# EAGLE board USBAspArduino (EAGLE 6.3)

Size 53.32 x 59.99 mm. Coordinates in mm from the lower left corner, seen from the top.
Outline: 0,0 53.32,0 53.32,59.99 0,59.99 0,0
Copper layers (1*16): Top 0.035mm / dielectric 1.5mm / Bottom 0.035mm
Design rules "default *": minimum track width 16mil, minimum drill 24mil, track to track 8mil, track to pad 8mil, pad to pad 8mil, via to via 8mil, smd to smd 8mil, copper to edge 40mil, drill to drill 8mil, minimum pad ring 10mil, minimum via ring 8mil, stop-mask expansion 4mil, vias tented up to drill 0mil, thermal gap 10mil

## Footprints (pad centres in the part's own frame; a part is rotated, then mirrored left to right if it is on the bottom)
C025-025X050 = drill 0.813 octagon: 1 -1.27,0; 2 1.27,0
2X3 = drill 1.016 pad 1.88 octagon: 1 0,0; 2 0,2.54; 3 2.54,0; 4 2.54,2.54; 5 5.08,0; 6 5.08,2.54
AVR_ICSP = drill 1.016 pad 1.88 octagon: 1 -1.27,5.08; 2 1.27,5.08; 3 -1.27,2.54; 4 1.27,2.54; 5 -1.27,0; 6 1.27,0; 7 -1.27,-2.54; 8 1.27,-2.54; 9 -1.27,-5.08; 10 1.27,-5.08
LED3MM = drill 0.813 octagon: A -1.27,0; K 1.27,0
0207/10 = drill 0.813 octagon: 1 -5.08,0; 2 5.08,0
DIP254P762X533-8 = drill 1.118 square: 1 -7.62,7.62 | drill 1.118: 2 -7.62,5.08; 3 -7.62,2.54; 4 -7.62,0; 5 0,0; 6 0,2.54; 7 0,5.08; 8 0,7.62
DIP254P762X533-20 = drill 1.118 square: 1 -7.62,22.86 | drill 1.118: 2 -7.62,20.32; 3 -7.62,17.78; 4 -7.62,15.24; 5 -7.62,12.7; 6 -7.62,10.16; 7 -7.62,7.62; 8 -7.62,5.08; 9 -7.62,2.54; 10 -7.62,0; 11 0,0; 12 0,2.54; 13 0,5.08; 14 0,7.62; 15 0,10.16; 16 0,12.7; 17 0,15.24; 18 0,17.78; 19 0,20.32; 20 0,22.86
DIP254P762X457-28 = drill 1.118 square: 1 -7.62,33.02 | drill 1.118: 2 -7.62,30.48; 3 -7.62,27.94; 4 -7.62,25.4; 5 -7.62,22.86; 6 -7.62,20.32; 7 -7.62,17.78; 8 -7.62,15.24; 9 -7.62,12.7; 10 -7.62,10.16; 11 -7.62,7.62; 12 -7.62,5.08; 13 -7.62,2.54; 14 -7.62,0; 15 0,0; 16 0,2.54; 17 0,5.08; 18 0,7.62; 19 0,10.16; 20 0,12.7; 21 0,15.24; 22 0,17.78; 23 0,20.32; 24 0,22.86; 25 0,25.4; 26 0,27.94; 27 0,30.48; 28 0,33.02
UNO_R3_SHIELD = drill 1.016 pad 1.88: 3.3V 50.8,26.67; 5V 50.8,29.21; A0 50.8,41.91; A1 50.8,44.45; A2 50.8,46.99; A3 50.8,49.53; A4 50.8,52.07; A5 50.8,54.61; AREF 2.54,15.24; D2 2.54,49.53; D3 2.54,46.99; D4 2.54,44.45; D5 2.54,41.91; D6 2.54,39.37; D7 2.54,36.83; D8 2.54,33.02; D9 2.54,30.48; D10 2.54,27.94; D11 2.54,25.4; D12 2.54,22.86; D13 2.54,20.32; GND@0 50.8,31.75; GND@1 50.8,34.29; GND@2 2.54,17.78; IOREF 50.8,21.59; NC 50.8,19.05; RES 50.8,24.13; RX 2.54,54.61; SCL 2.54,10.16; SDA 2.54,12.7; TX 2.54,52.07; VIN 50.8,36.83
QS = drill 0.61 long: 1 -2.54,0; 2 2.54,0

## Placement (x,y rotation side)
C1  22pf  [C025-025X050]  38.1,49.53 90 top
C2  22pf  [C025-025X050]  43.18,49.53 270 top
J1  AVR_SPI_PRG_6PTH  [2X3]  34.29,7.62 180 top
J2  AVR_SPI_PROG2PTH  [AVR_ICSP]  44.45,6.35 270 top
LED1  PROG  [LED3MM]  10.16,13.97 0 top
LED2  ERR  [LED3MM]  10.16,9.53 0 top
LED3  PULSE  [LED3MM]  10.16,4.45 0 top
R1  1k  [0207/10]  20.32,13.97 0 top
R2  1k  [0207/10]  20.32,8.89 0 top
R3  1k  [0207/10]  20.32,4.45 0 top
U1  ATTINY45-20PU  [DIP254P762X533-8]  11.43,25.4 180 top
U2  ATTINY2313V-10PU  [DIP254P762X533-20]  11.43,54.61 180 top
U3  ATMEGA328P-PU  [DIP254P762X457-28]  25.4,57.15 180 top
U$1  ARDUINO_R3_SHIELD  [UNO_R3_SHIELD]  0,0 0 top
XTAL  16 MHZ  [QS]  40.64,55.88 180 top

## Library data of the parts
C1 C2 = rcl
J1 J2 = SparkFun-Connectors
LED1-LED3 = led
R1-R3 = resistor
U1 = Atmel_By_element14_Batch_1-00; MPN: ATTINY45-20PU; OC_FARNELL: 1288352; OC_NEWARK: 23M5072; PACKAGE: PDIP-8; SUPPLIER: Atmel
U2 = Atmel_By_element14_Batch_1-00; MPN: ATTINY2313V-10PU; OC_FARNELL: 9171614; OC_NEWARK: 01M6916; PACKAGE: DIP-20; SUPPLIER: ATMEL
U3 = Atmel_By_element14_Batch_1-00; MPN: ATMEGA328P-PU; OC_FARNELL: 1715487; OC_NEWARK: 15R0268; PACKAGE: PDIP-28; SUPPLIER: Atmel
U$1 = SparkFun-Boards
XTAL = special

## Nets
+5V: J1.2 J2.2 U1.8 U2.20 U3.7 U3.20 U$1.5V
GND: C1.1 C2.1 J1.6 J2.4 J2.6 J2.8 J2.10 R1.2 R2.2 R3.2 U1.4 U2.10 U3.8 U3.22 U$1.GND@0 U$1.GND@1 U$1.GND@2
MISO: J1.1 J2.9 U1.6 U2.18 U3.18 U$1.D12
MOSI: J1.4 J2.1 U1.5 U2.17 U3.17 U$1.D11
N$1: LED1.A U$1.D7
N$2: LED2.A U$1.D8
N$3: LED3.A U$1.D9
N$4: LED1.K R1.1
N$5: LED2.K R2.1
N$6: LED3.K R3.1
N$8: C2.2 U3.10 XTAL.1
RESET: J1.5 J2.5 U1.1 U2.1 U3.1 U$1.D10
SCK: C1.2 J1.3 J2.7 U1.7 U2.19 U3.9 U3.19 U$1.D13 XTAL.2

## Tracks (layer width: path | path; a pad name or v marks a point on that pad's centre or on a via)
+5V  (6 unrouted)
GND  (16 unrouted)
MISO  (5 unrouted)
MOSI  (5 unrouted)
N$1  (1 unrouted)
N$2  (1 unrouted)
N$3  (1 unrouted)
N$4  (1 unrouted)
N$5  (1 unrouted)
N$6  (1 unrouted)
N$8  (2 unrouted)
RESET  (5 unrouted)
SCK  (8 unrouted)